# Altium PCB PCB1.PcbDoc
Units mil, origin at the board's own origin, x right, y up, seen from the top; angles counter-clockwise.
Board outline 3390 x 2455 mil, 2 copper layers (Top Layer, Bottom Layer); 15 components, 18 nets, 70 pads, 4 vias.
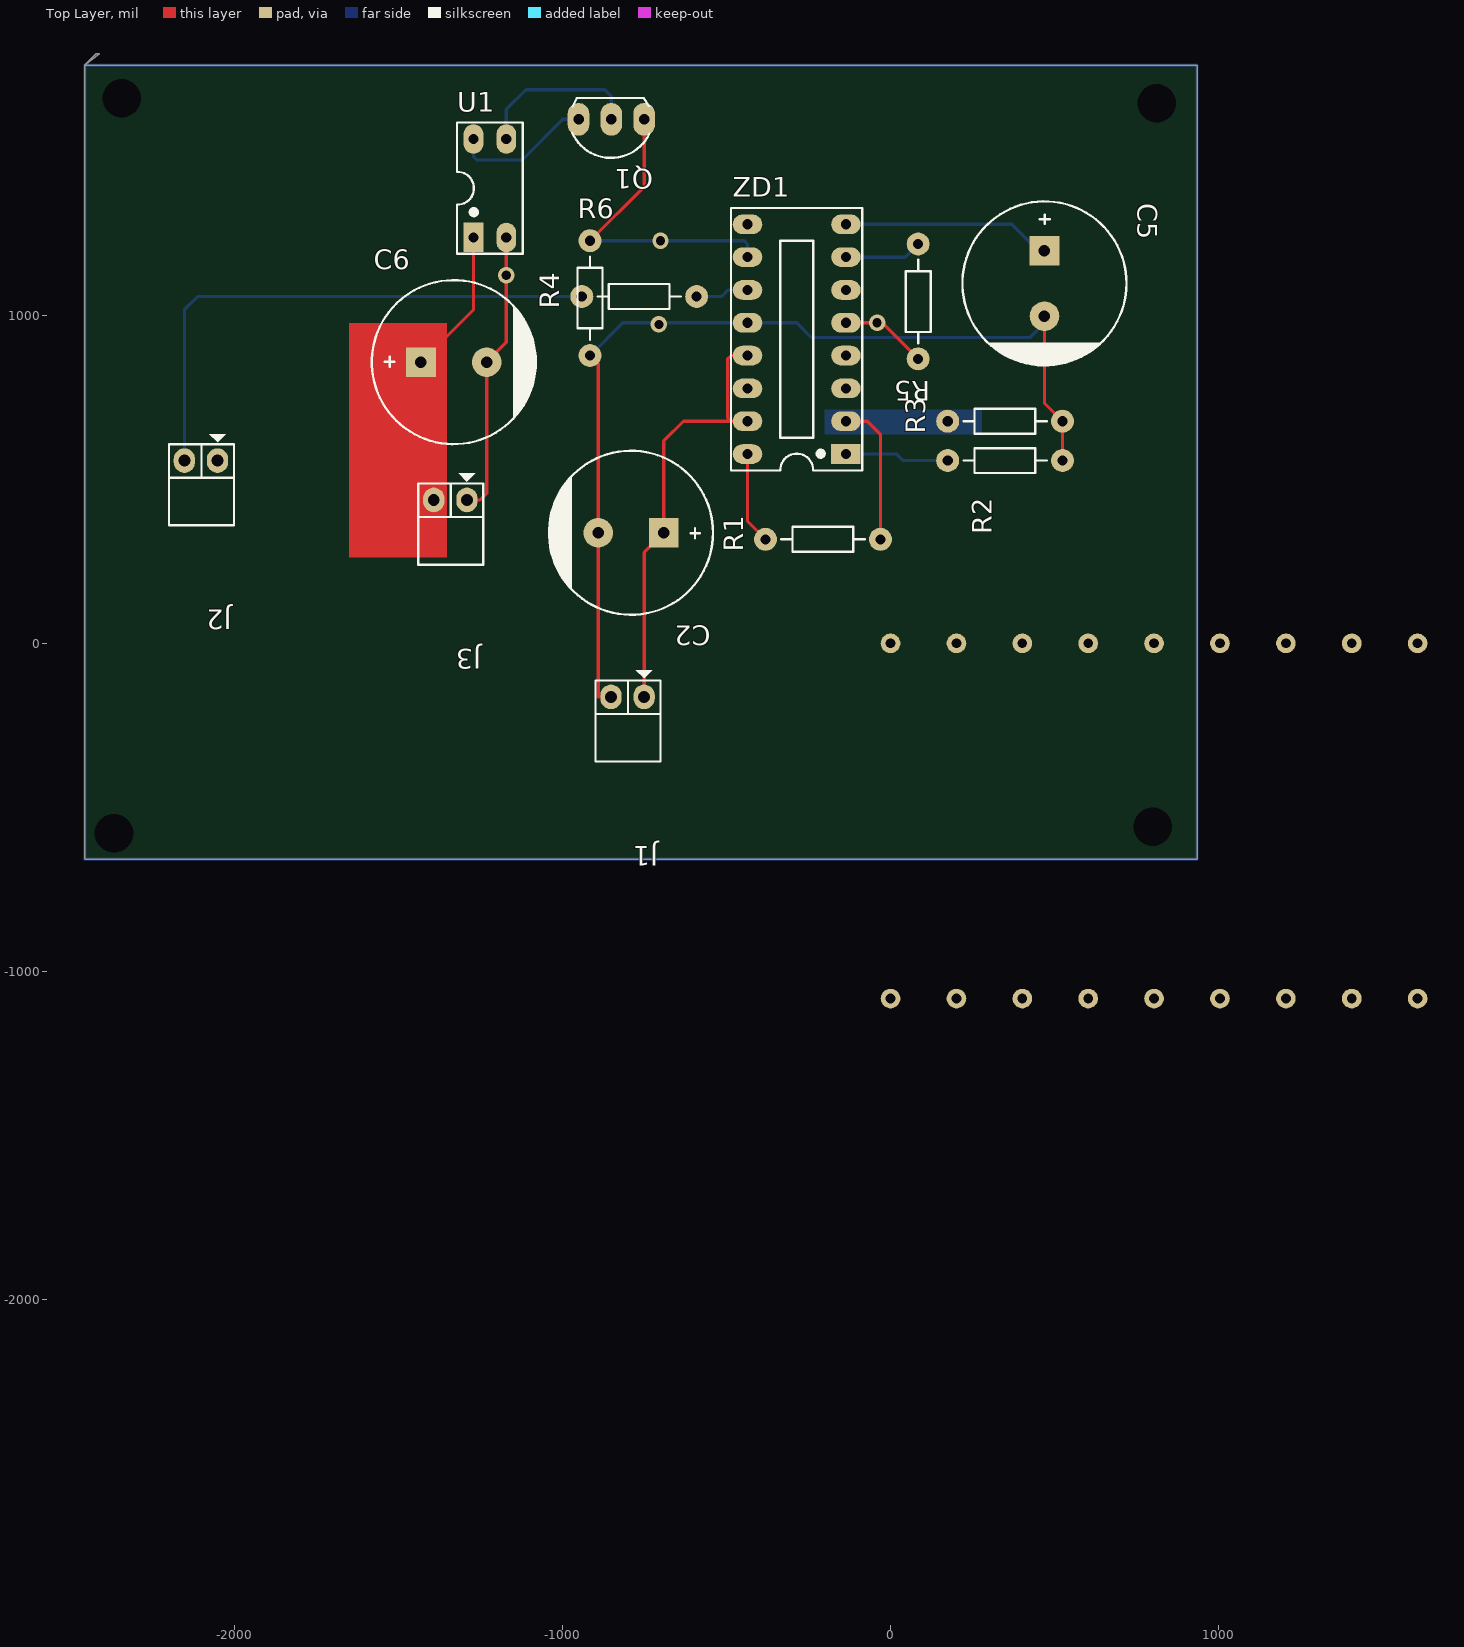
[diagram p0: Top Layer view]
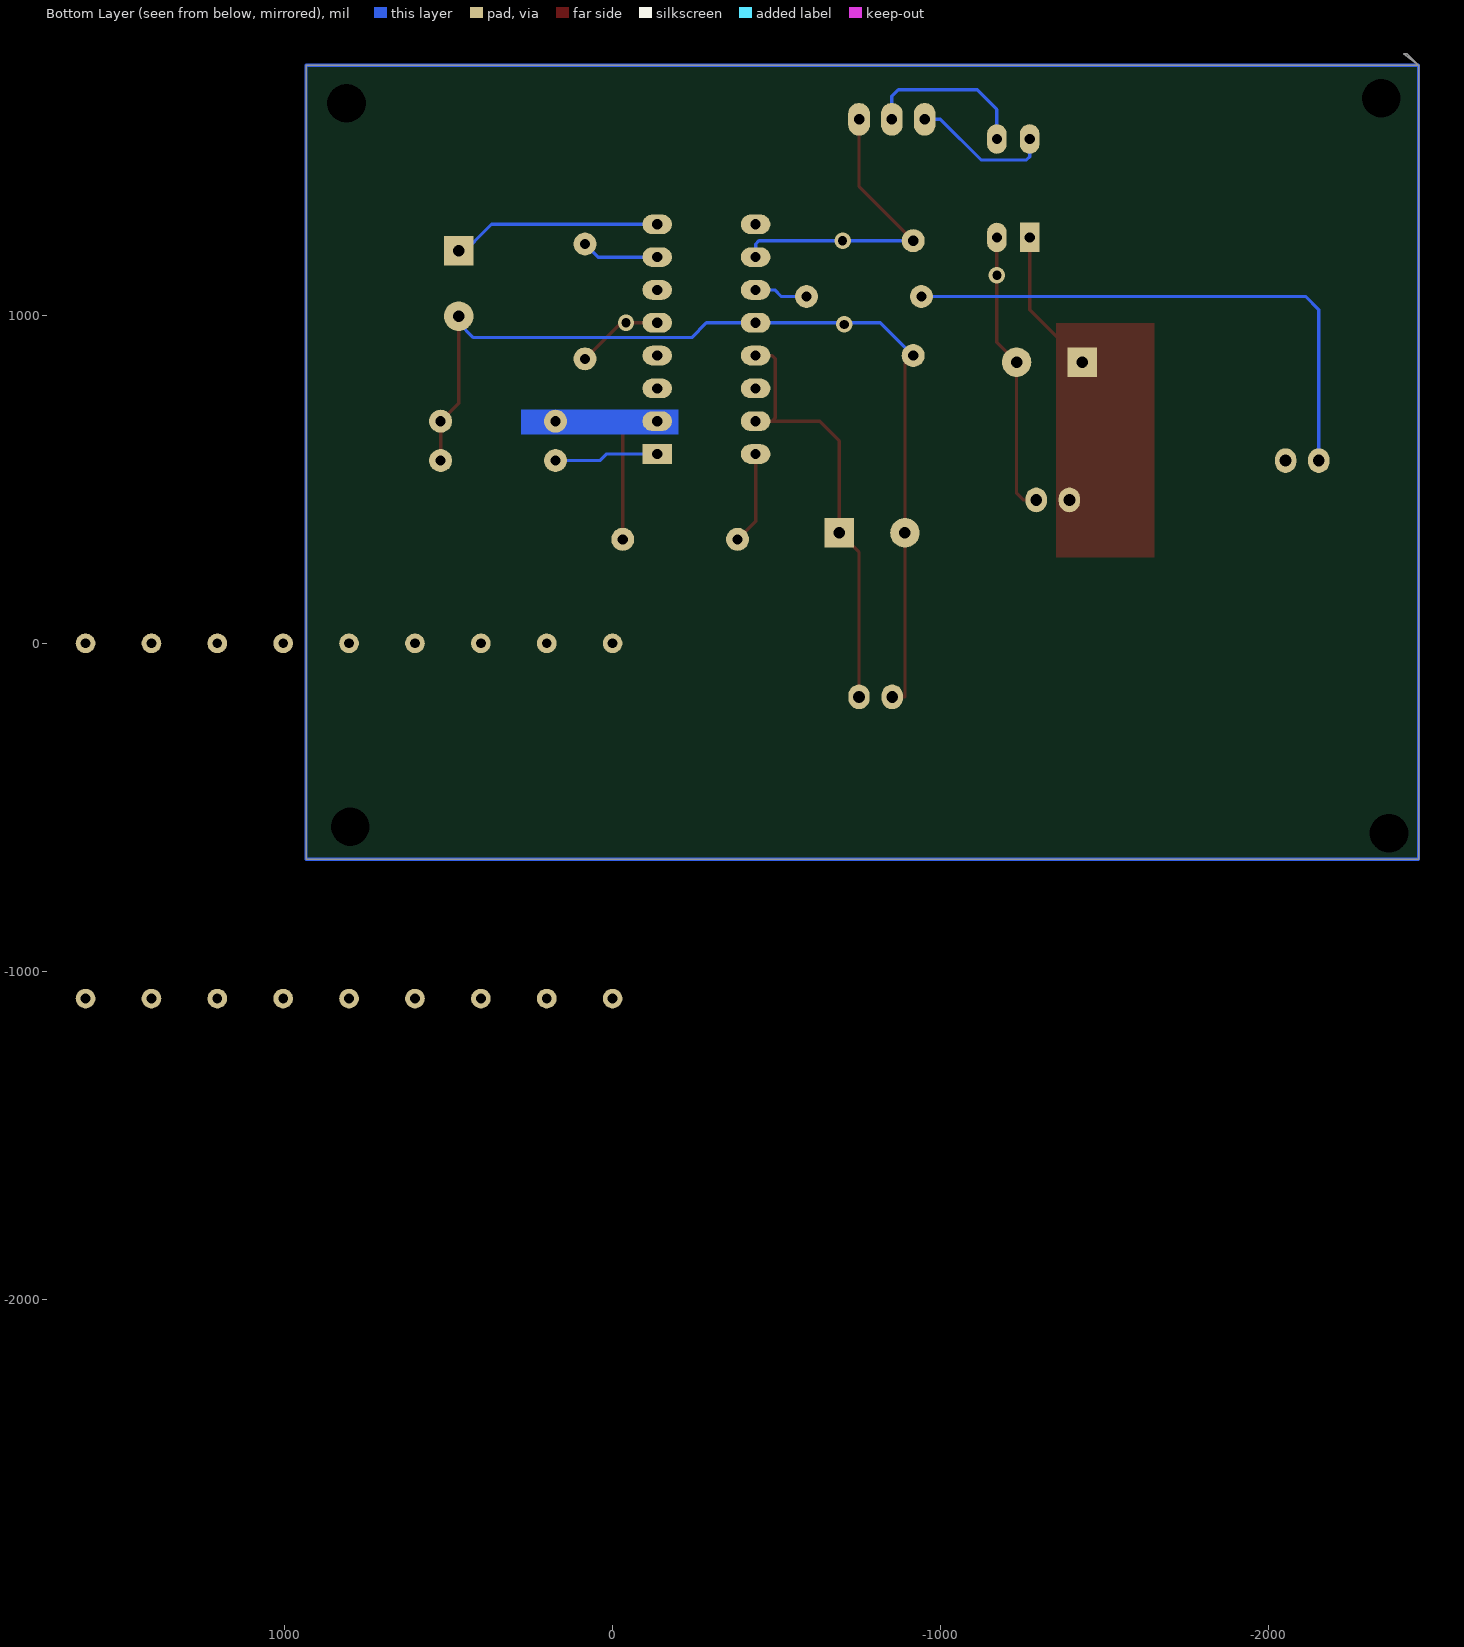
[diagram p1: Bottom Layer view, seen from below]

## Layer stack, top to bottom
Top Layer: signal copper 1.4
Dielectric: dielectric 12.6, FR-4, Dk 4.8
Bottom Layer: signal copper 1.4

## Board outline
-2455.87,1761.85 934.13,1761.85 934.13,-658.15 -2455.87,-658.15 -2455.87,1761.85 -2420.87,1796.85 -2410.87,1796.85

## Design rules (kind name [scope] priority, off if disabled: settings)
Clearance [All] p1: gap=10
PolygonConnect [All] p1: connectstyle=Relief reliefconductorwidth=10 reliefentries=4 polygonreliefangle="90 Angle"
RoomDefinition Sheet2 [InComponentClass('Sheet2')] p1: confinementstyle=ConfineIn formatcopy=TRUE lockcomponents=FALSE outline 2849.13,-1323.15 7304.13,-1323.15 7304.13,-403.15 2849.13,-403.15
RoutingVias [All] p1: holewidth=28 width=50 viastyle="Through Hole" minholewidth=28 minwidth=50 maxholewidth=28 maxwidth=50
SilkscreenOverComponentPads [All] p1: minsilkscreentomaskgap=10
SolderMaskExpansion [All] p1: expansion=4
Width [All] p1: maxlimit=10 minlimit=10 preferedwidth=10
27 further rules are at their usual default settings.

## Components (designator, comment, footprint, x,y, rotation, side; value= is the part's Value field where it differs from the comment)
C2 "Cap Pol3" CP2/5 -690.87,336.85 r180 top
C5 "Cap Pol3" CP2/5 469.13,1196.85 r270 top
C6 "Cap Pol3" CP2/5 -1430.87,856.85 r0 top
J1 "Jumper 2" jp2h -750.87,-163.15 r180 top
J2 "Jumper 2" jp2h -2050.87,556.85 r180 top
J3 "Jumper 2" jp2h -1290.87,436.85 r180 top
Q1 "C9014" QTO-92 -850.87,1596.85 r180 top
R1 "2k2" R1/4W -30.87,316.85 r180 top
R2 "2k2" R1/4W 524.13,556.85 r180 top
R3 "2k2" R1/4W 524.13,676.85 r180 top
R4 "2k2" R1/4W -590.87,1056.85 r180 top
R5 "10k" R1/4W 84.13,1216.85 r270 top
R6 "2k2" R1/4W -915.87,876.85 r90 top
U1 "PC817" DIP4/W0.3 -1270.87,1236.85 r0 top
ZD1 "DIP16" DIP16/W0.3 -135.87,576.85 r90 top

## Footprints (in the part's own frame and the unit in brackets; to place one, negate y for a bottom-side part, rotate by r counter-clockwise, add the part's x,y. Pads: shape width x height; smd on the part's side, far side on the other; paste and mask are expansions set on the pad)
CP2/5 [mil] "Tu hoa 1000uF/25V,50V"
  rect 90x90 hole 35: 1(0,0)
  round 90 hole 35: 2(200,0)
  silkscreen extent -150,-250 350,250, body extent -142,-246 350,246, height 984
DIP4/W0.3 [mil] "4 PIN, W 300mil, Pin to pin 100mil"
  rect 60x90 hole 31: 1(0,0)
  oval 60x90 hole 31: 2(100,0) 3(100,300) 4(0,300)
  silkscreen extent -50,-50 150,350, body extent -59,-10 159,305, height 170
DIP16/W0.3 [mil] "16 PIN, W 300mil, Pin to pin 100mil"
  rect 60x90 hole 31: 1(0,0)
  oval 60x90 hole 31: 2(100,0) 3(200,0) 4(300,0) 5(400,0) 6(500,0) 7(600,0) 8(700,0) 9(700,300) 10(600,300) 11(500,300) 12(400,300) 13(300,300) 14(200,300) 15(100,300) 16(0,300)
  silkscreen extent -50,-50 750,350, body extent -52,-57 752,356, height 299
jp2h [mil]
  oval 65x75 hole 36: 1(0,0) 2(101,0)
  silkscreen extent -50,-81 148,197, body extent -44,-14 148,424, height 99
QTO-92 [mil] "TO-92"
  oval 66x100 hole 32: 1(-100,0) 2(0,0) 3(100,0)
  silkscreen extent -117,-65 120,118, body extent -109,-66 109,95, height 245
R1/4W [mil] "R 1/4W, 2 Pin, 350mil"
  round 70 hole 31: 1(0,0) 2(350,0)
  silkscreen extent 48,-38 302,38, body extent -40,-47 386,47, height 111

## Part data
C2 C5 C6: library part "Cap Pol3_1", "Polarized Capacitor (Surface Mount)"
J1 J2 J3: library part "JP 2"
Q1: "PNP 600mW, EBC"
R1 R2 R3 R4 R5 R6: library part R1/4W, "Resistor 1/4W"
U1: "Single Opto"

## Free pads (board coordinates)
  round 60 hole 118: 0(-2366.14,-578.74) 0(-2342.52,1661.42) 0(799.21,-559.06) 0(811.02,1645.67) 3(-2424.17,-2839.06)
  round 60 hole 30: 0(0,-1082.68) 0(0,0) 1(200.79,-1082.68) 1(200.79,0) 2(401.57,-1082.68) 2(401.57,0) 3(803.15,-1082.68) 3(803.15,0) 4(602.36,-1082.68) 4(602.36,0) 5(1003.94,-1082.68) 5(1003.94,0) 6(1204.72,-1082.68) 6(1204.72,0) 8(1405.51,-1082.68) 8(1405.51,0) 9(1606.3,-1082.68) 9(1606.3,0)

## Via types
v1: diameter 50, hole 28, Top Layer to Bottom Layer, tented both sides, 4 vias

## Nets (pads, with @x,y where several pads share a name; then routed paths per layer and width w, separated by ;. In a path a pad name is that pad's centre, name@x,y a point inside that pad or via, vN(x,y) a via of type N, cw(c..) or ccw(c..) an arc to the next point about the centre after c; other vN are vias at no path point)
GND: C2.2 C5.2 J1.2 R2.1 R3.1 R6.1 ZD1.12 | length 2995.8
  Top Layer w10: R6.1 -890.87,851.85 C2.2 -890.87,-163.15 J1.2 ; C5.2@469.13,976.85 469.13,731.85 R3.1 R2.1
  Bottom Layer w10: R6.1 -815.87,976.85 ZD1.12 -285.87,976.85 -240.87,931.85 424.13,931.85 C5.2@469.13,976.85
  other v1: -705.87,971.85
NetC1_1: C2.1 J1.1 ZD1.13 ZD1.15 | length 1393
  Top Layer w10: J1.1 -750.87,276.85 C2.1 -690.87,616.85 -630.87,676.85 -485.87,676.85 ; ZD1.13 -485.87,876.85 -495.87,866.85 -495.87,686.85 -485.87,676.85 ; -485.87,676.85 ZD1.15 -485.87,676.85
NetC3_1: ZD1.14
NetC3_2: J2.1
NetC4_2: ZD1.6
NetC5_1: C5.1 ZD1.8 | length 646.4
  Bottom Layer w10: ZD1.8 369.13,1276.85 C5.1@469.13,1176.85
NetC6_1: C6.1 J3.2 U1.1 | length 905.3
  Top Layer w10: J3.2 -1430.87,436.85 C6.1 -1270.87,1016.85 U1.1
NetC6_2: C6.2 J3.1 U1.2 | length 873.1
  Top Layer w10: J3.1 -1250.87,436.85 -1230.87,456.85 C6.2 -1170.87,916.85 U1.2
  other v1: -1170.87,1121.85
NetJ2_2: J2.2 R4.2 | length 1687.6
  Bottom Layer w10: J2.2 -2151.87,1016.85 -2111.87,1056.85 R4.2
NetQ1_1: Q1.1 R6.2 ZD1.10 | length 962.5
  Top Layer w10: R6.2 -750.87,1391.85 Q1.1
  Bottom Layer w10: R6.2 -445.87,1226.85 -435.87,1216.85 ZD1.10
  other v1: -700.87,1226.85
NetQ1_2: Q1.2 U1.3 | length 513.1
  Bottom Layer w10: U1.3 -1170.87,1626.85 -1110.87,1686.85 -870.87,1686.85 -850.87,1666.85 Q1.2
NetR1_1: R1.1 R3.2 ZD1.2 | length 751.6
  Top Layer w10: ZD1.2 -70.87,676.85 -30.87,636.85 R1.1
  Bottom Layer w10: ZD1.2 R3.2
NetR1_2: R1.2 ZD1.16 | length 282.8
  Top Layer w10: ZD1.16 -435.87,371.85 R1.2
NetR2_2: R2.2 ZD1.1 | length 318.3
  Bottom Layer w10: ZD1.1 19.13,576.85 39.13,556.85 R2.2
NetR4_1: R4.1 ZD1.11 | length 163.3
  Bottom Layer w10: R4.1 -513.87,1056.85 -493.87,1076.85 ZD1.11
NetR5_1: R5.1 ZD1.7 | length 236.6
  Bottom Layer w10: ZD1.7 44.13,1176.85 R5.1
NetR5_2: R5.2 ZD1.5 | length 265.6
  Top Layer w10: ZD1.5 -25.87,976.85 R5.2
  other v1: -40.87,976.85
VCC: Q1.3 U1.4 | length 429.5
  Bottom Layer w10: U1.4 -1270.87,1482.85 -1260.87,1472.85 -1122.87,1472.85 -998.87,1596.85 Q1.3
pads on no net: ZD1.3 ZD1.4 ZD1.9
copper on no net: | length 11620
  Bottom Layer w10: -2455.87,-658.15 -2435.87,-658.15 934.13,-658.15 934.13,1761.85 -2455.87,1761.85 -2455.87,-658.15

## Other copper
Top Layer:
  rectangle net NetC6_1: -1650.87,261.85 -1350.87,976.85
Bottom Layer:
  rectangle net NetR1_1: -200.87,636.85 279.13,711.85

## Dimensions
-2455.87,1761.85 to -2455.87,-658.15 on Top Layer
-2455.87,1761.85 to 934.13,1761.85 on Top Layer